# EAGLE board boilerplate (EAGLE 9.5.0)
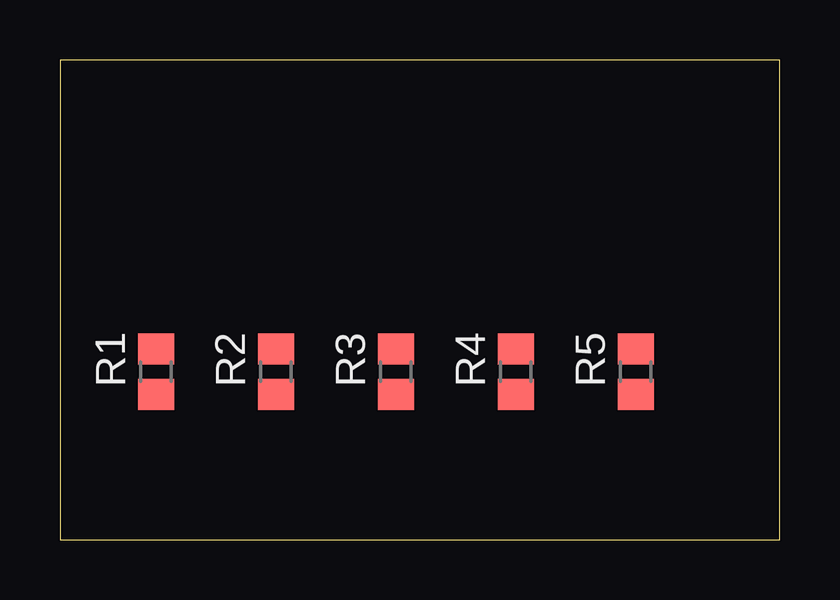
[diagram p0: board, top side]
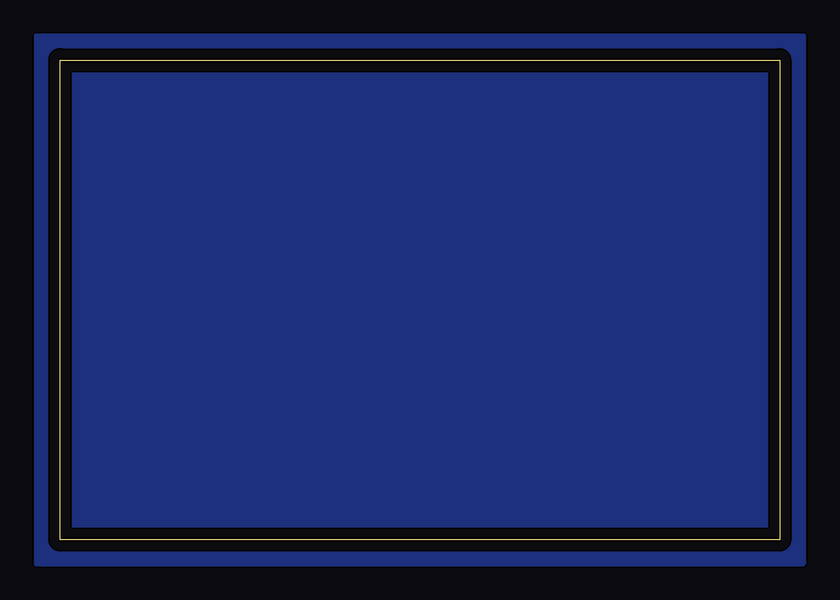
[diagram p1: board, bottom side, seen from below]

Size 30 x 20 mm. Coordinates in mm from the lower left corner, seen from the top.
Outline: 0,0 30,0 30,20 0,20 0,0
Copper layers (1*16): Top 0.035mm / dielectric 0.5mm / Bottom 0.035mm
Design rules "default *": minimum track width 6mil, minimum drill 0.3mm, track to track 6mil, track to pad 6mil, pad to pad 6mil, via to via 6mil, smd to smd 6mil, copper to edge 0.5mm, drill to drill 6mil, minimum pad ring 0.2mm, minimum via ring 0.2mm, stop-mask expansion 4mil, vias tented up to drill 0mil, thermal gap 10mil

## Footprints (pad centres in the part's own frame; a part is rotated, then mirrored left to right if it is on the bottom)
A0R-JMP = smd 1.5 x 1.3: 1 0,1.7; 2 0,0; 3 0,-1.7
R0805 = smd 1.3 x 1.5: 1 -0.95,0; 2 0.95,0

## Placement (x,y rotation side)
JMP1  0R-JUMPA  [A0R-JMP]  -8,4 0 top  (outside the outline)
R1  [R0805]  4,7 90 top
R2  [R0805]  9,7 90 top
R3  [R0805]  14,7 90 top
R4  [R0805]  19,7 90 top
R5  [R0805]  24,7 90 top

## Library data of the parts
JMP1 = jump-0r-smd
R1-R5 = rcl; SPICEPREFIX: R

## Nets
N$1: JMP1.2
N$2: JMP1.1
N$3: JMP1.3
N$6: R1.2
N$7: R2.2
N$8: R3.2
N$9: R4.2
N$10: R5.2
VCOM: R3.1
VEE: R5.1
VGG: R4.1
VNEG: R1.1
VPOS: R2.1

## Tracks (layer width: path | path; a pad name or v marks a point on that pad's centre or on a via)
GND
  pour Bottom (rank 6, no thermals): -1,21 31,21 31,-1 -1,-1